# Altium PCB FK723MK1_ZGT6_DSUB.PcbDoc
Units mm, origin at the board's own origin, x right, y up, seen from the top; angles counter-clockwise.
Board outline 120 x 110 mm, 4 copper layers (Top Layer, GND, +3V3, Bottom Layer), stack 1.652 mm thick; 49 components, 138 nets, 316 pads, 50 vias.
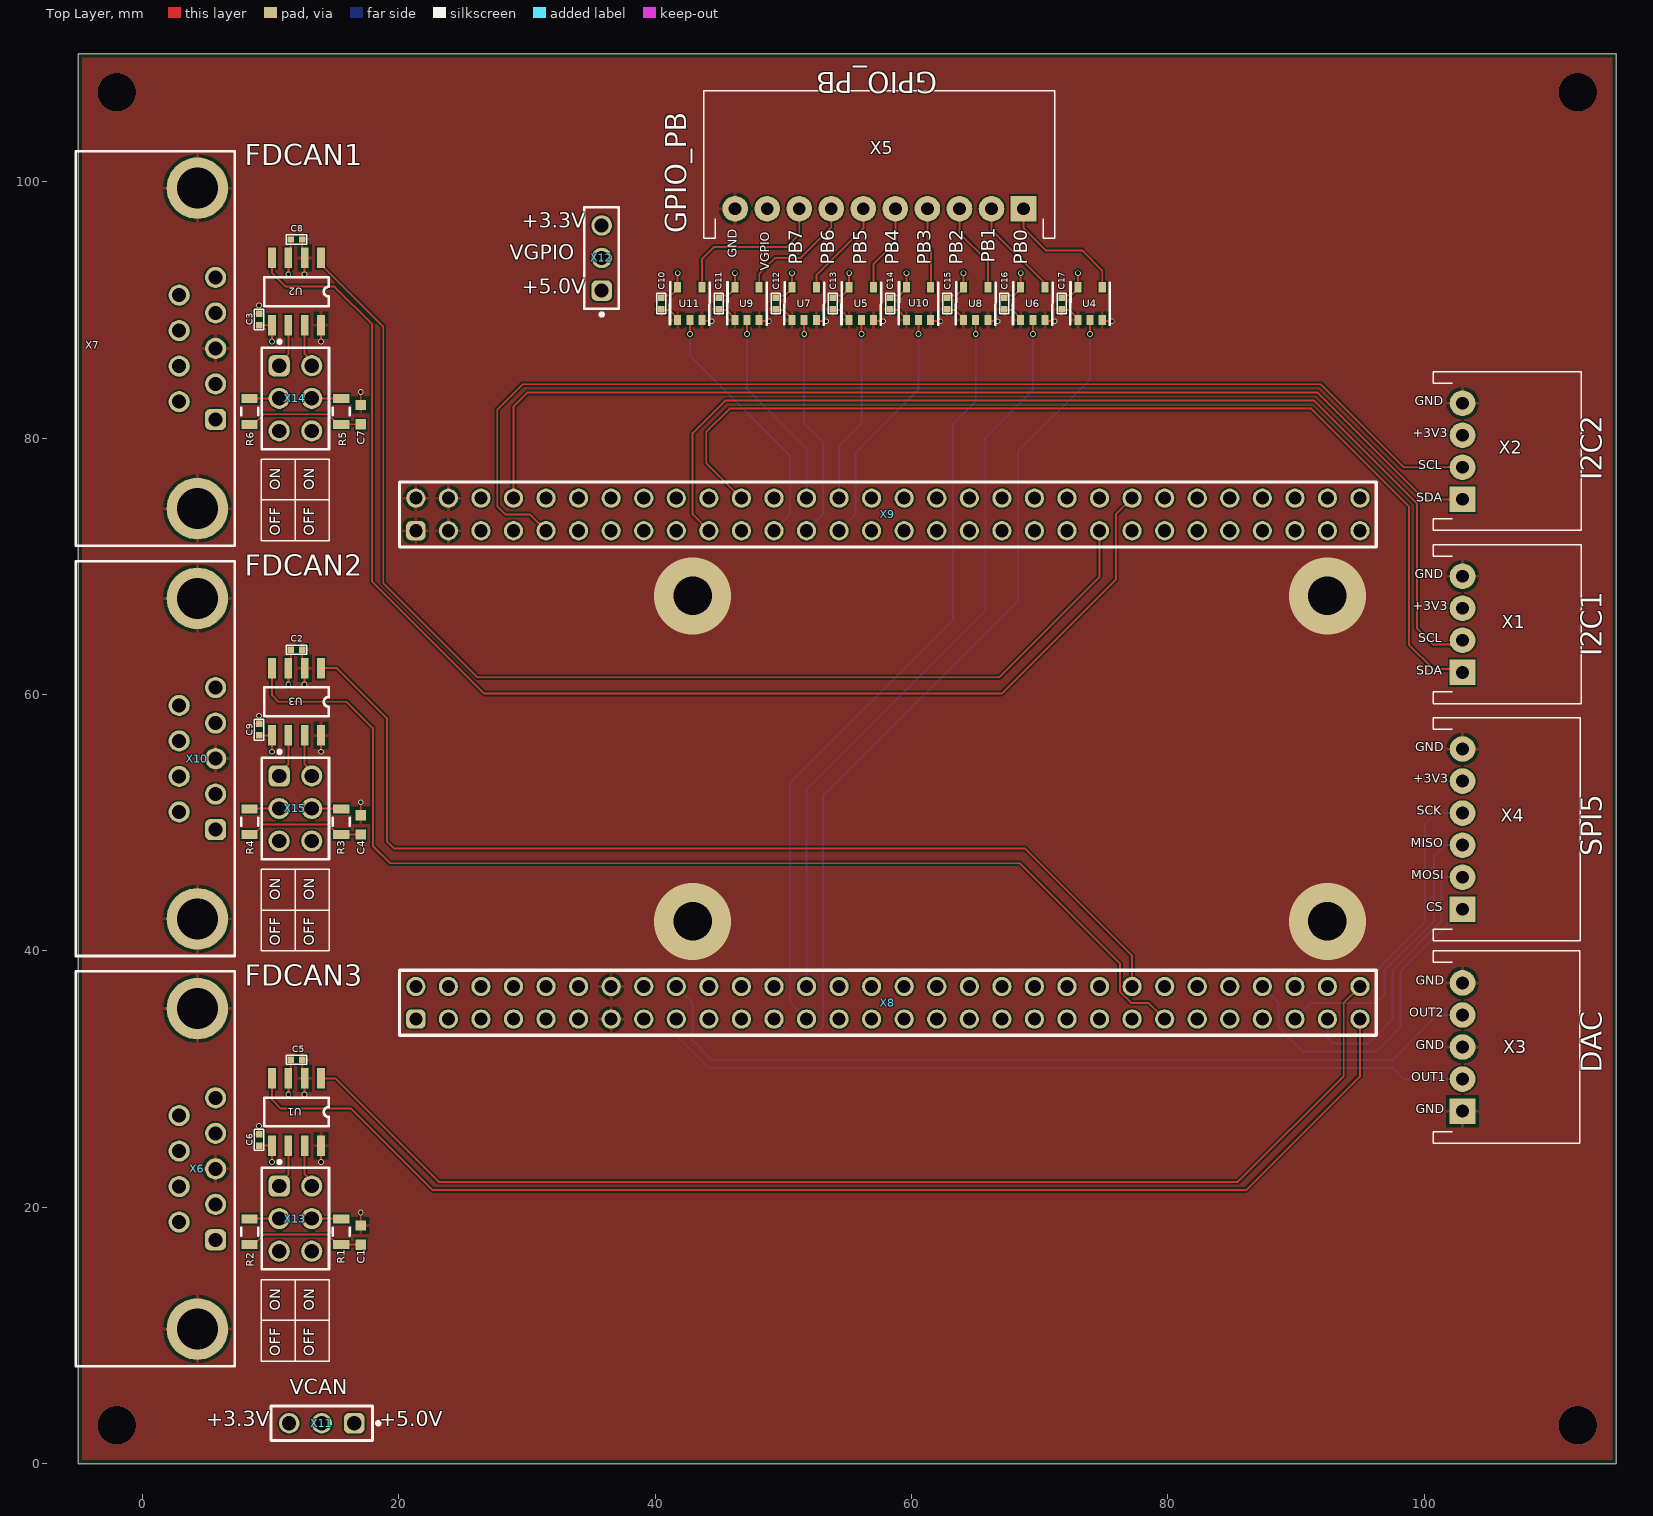
[diagram p0: Top Layer view]
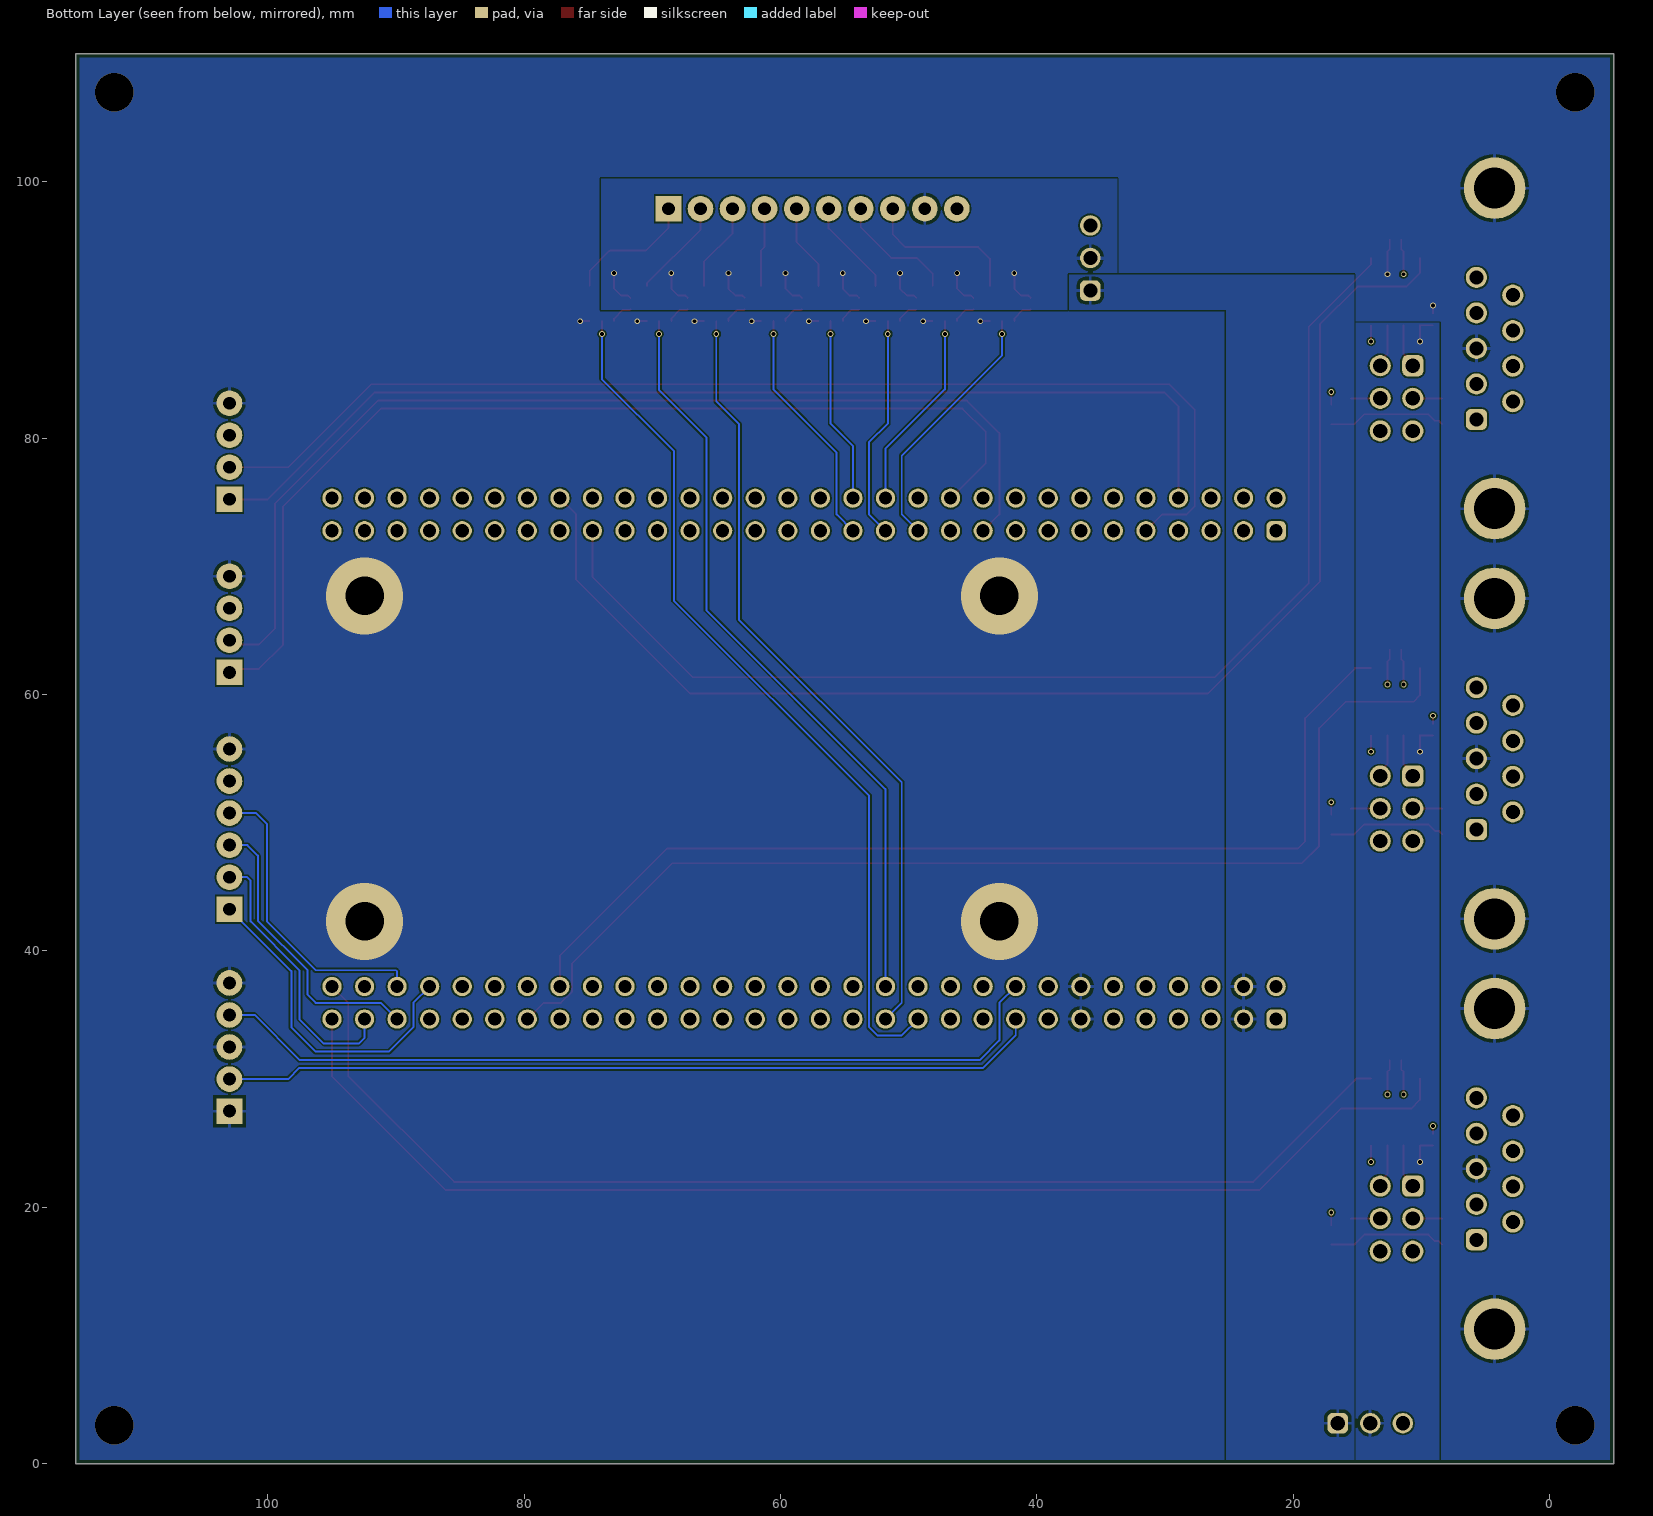
[diagram p1: Bottom Layer view, seen from below]
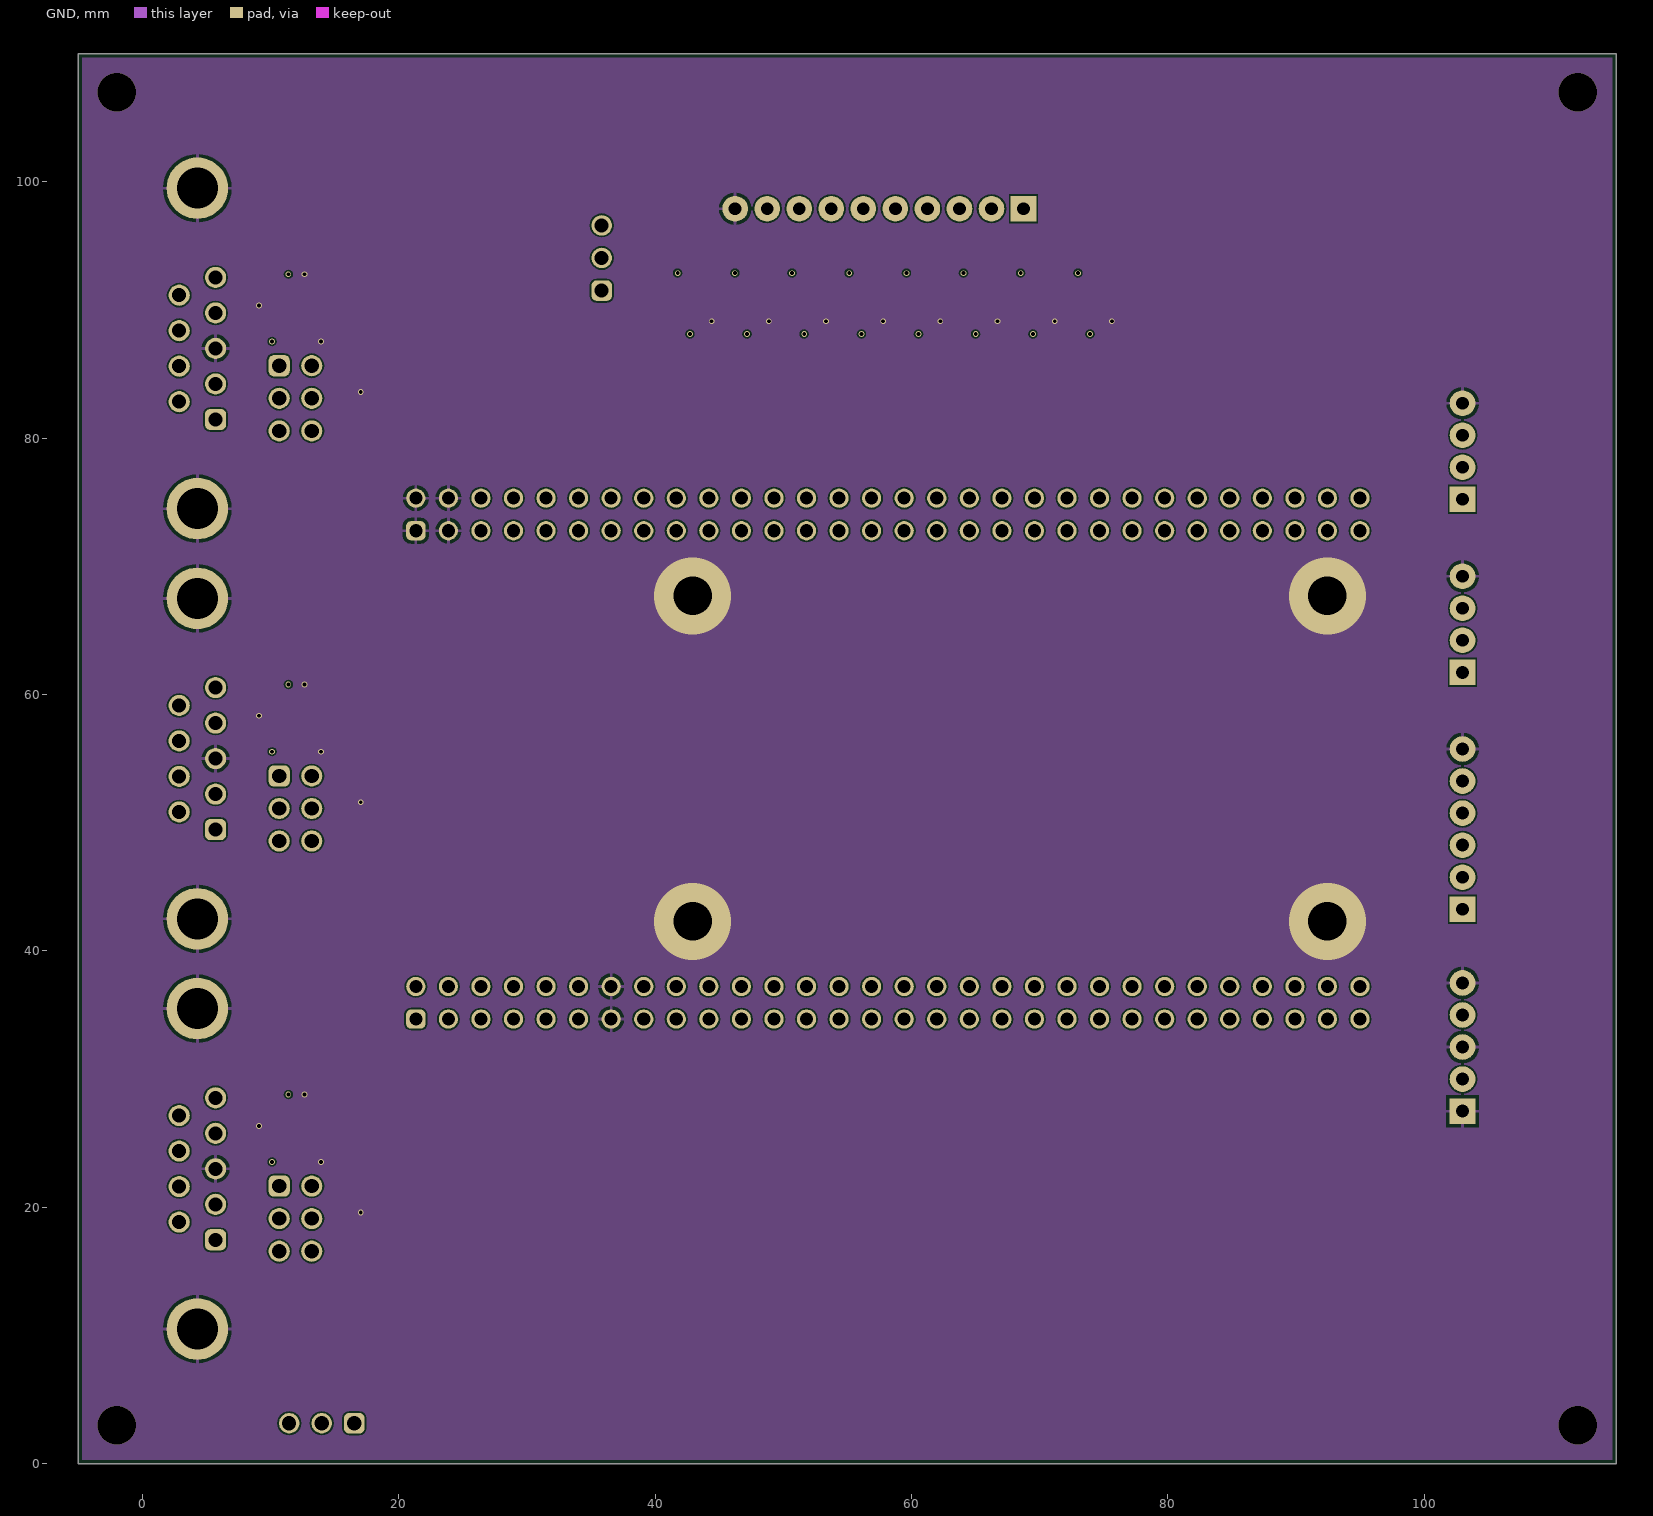
[diagram p2: GND]
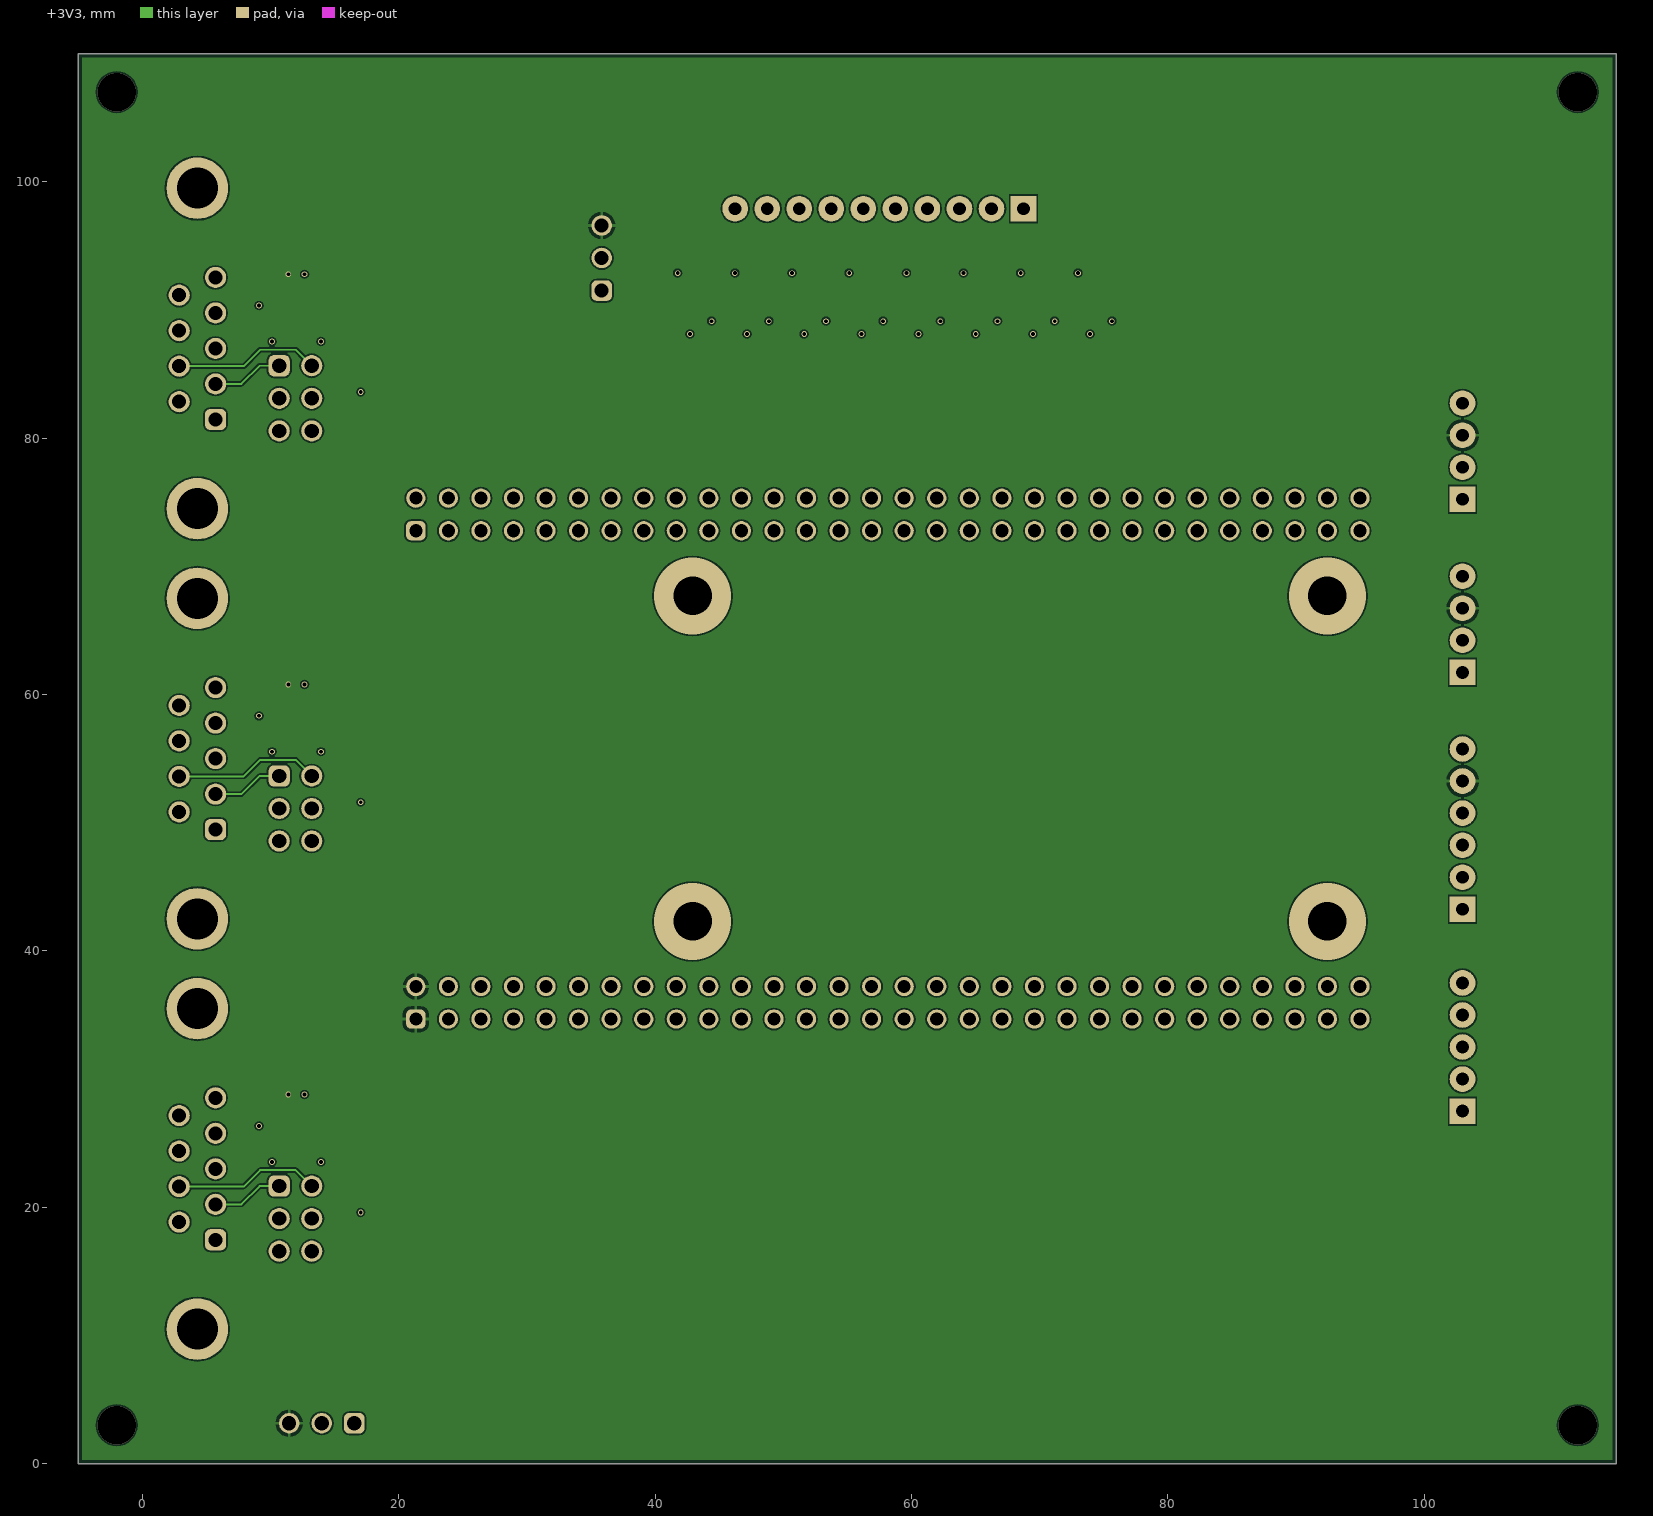
[diagram p3: +3V3]
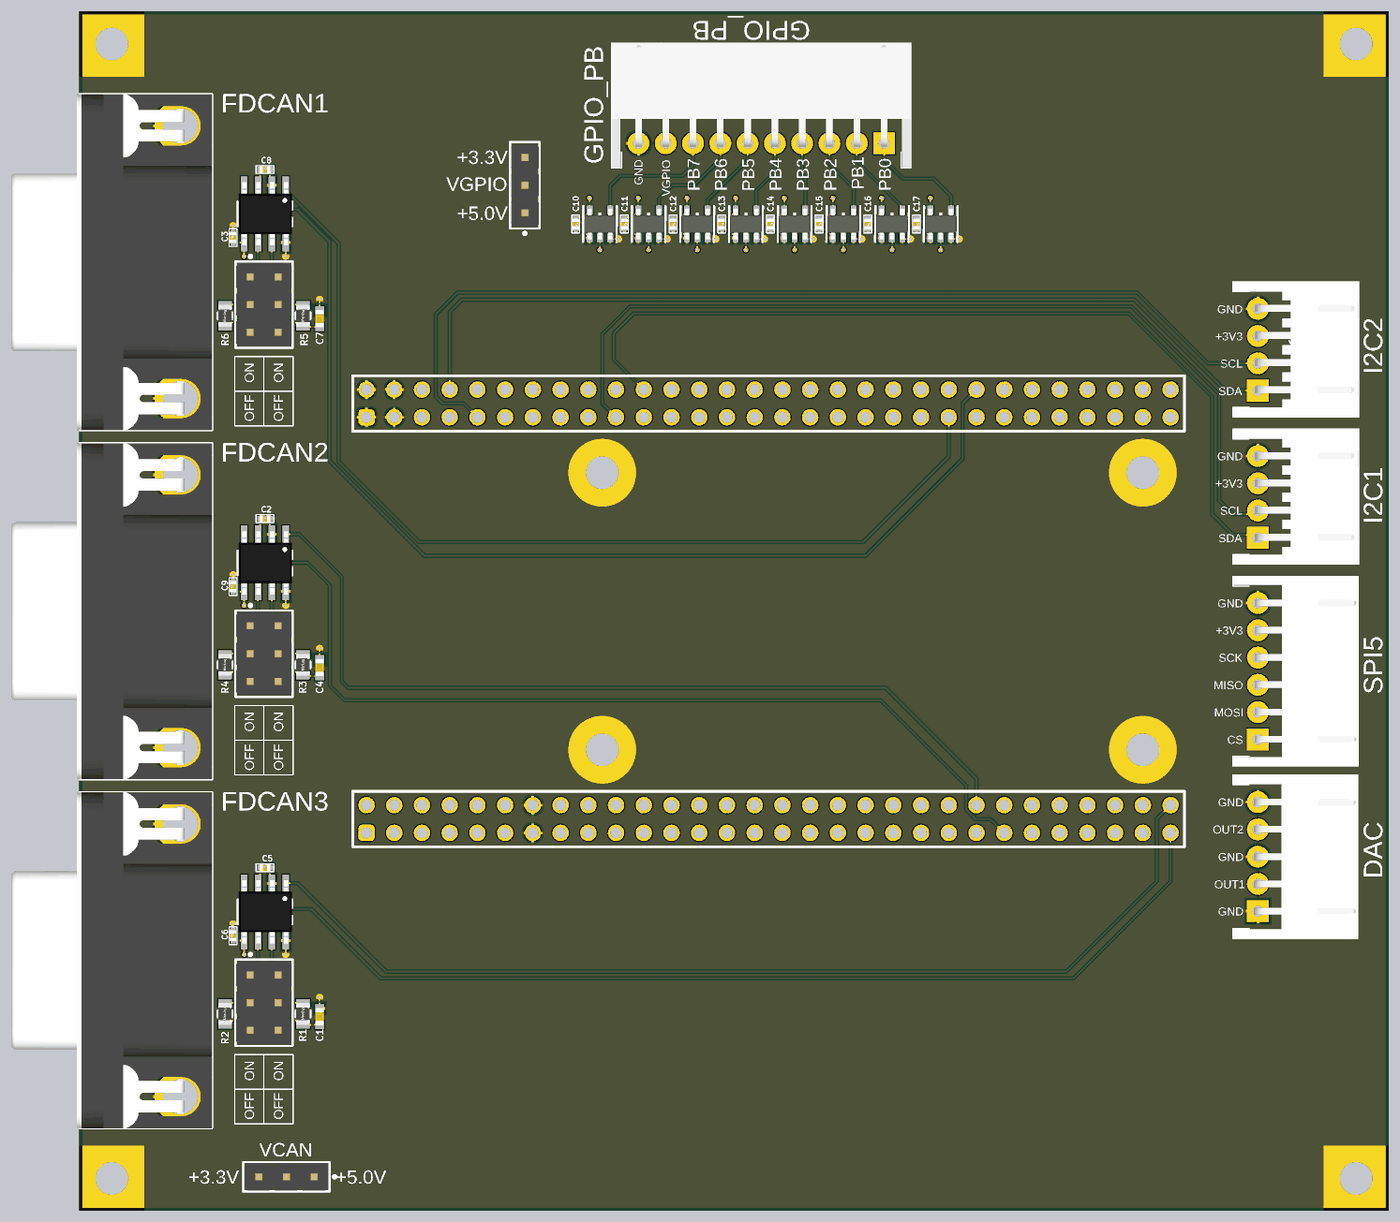
[diagram p4: 3D render of the assembled board from above, using the file's embedded part models]

## Layer stack, top to bottom
Top Solder: solder mask 0.0102, Solder Resist, Dk 3.5
Top Layer: signal copper 0.035
Prepreg 2x1080: core 0.156, FR-4, Dk 4.2
GND: signal copper 0.035
Core: prepreg 1.2, Dk 4.2
+3V3: signal copper 0.035
Prepreg 2x1080: core 0.156, Dk 4.2
Bottom Layer: signal copper 0.035
Bottom Solder: solder mask 0.0102, Solder Resist, Dk 3.5

## Board outline
-5,0 115,0 115,110 -5,110

## Design rules (kind name [scope] priority, off if disabled: settings)
BoardOutlineClearance [All] p1: gap=0.3 ignorepadtopadclearanceinfootprint=FALSE
Clearance [All] p1: gap=0.125 ignorepadtopadclearanceinfootprint=FALSE
FabricationTestPointUsage TestPointUsage [All] p1: valid=0 allowmultiple=FALSE
FabricationTestpoint Testpoint [All] p1: side=3 testpointundercomponent=TRUE minsize=1.016 maxsize=2.54 preferedsize=1.524 minholesize=0 maxholesize=1.016 preferedholesize=0.813 testpointgrid=0.025 allowsidetop=TRUE allowsidebottom=TRUE usegrid=TRUE gridtolerance=0
HoleSize [All] p1: absolutevalues=TRUE maxlimit=5.08 minlimit=0.025 maxpercent=80.000 minpercent=20.000
PolygonConnect PolygonConnect_Via [isVia] p1: connectstyle=Direct reliefconductorwidth=0.254 reliefentries=4 polygonreliefangle="90 Angle" airgapwidth=0.254
PolygonConnect PolygonConnect_Hole [HasFootprint('M2')] p2: connectstyle=Direct reliefconductorwidth=0.254 reliefentries=4 polygonreliefangle="90 Angle" airgapwidth=0.254
PolygonConnect [All] p3: connectstyle=Relief reliefconductorwidth=0.254 reliefentries=4 polygonreliefangle="90 Angle" airgapwidth=0.254
RoutingVias [All] p1: holewidth=0.4 width=0.8 viastyle="Through Hole" minholewidth=0.4 minwidth=0.8 maxholewidth=0.8 maxwidth=1.27
SilkToSolderMaskClearance SilkscreenOverComponentPads [IsPad] p1: minsilkscreentomaskgap=0.254 clearancetoexposedcopper=TRUE
SolderMaskExpansion [All] p1: expansion=0.102 istentingtop=FALSE
SupplyNets "Schematic Supply Nets_10" [InNet('VCAN')] p1: voltage=0.000
SupplyNets "Schematic Supply Nets_9" [InNet('VGPIO')] p2: voltage=0.000
SupplyNets "Schematic Supply Nets_8" [InNet('FDCAN3_RX')] p3: voltage=0.000
SupplyNets "Schematic Supply Nets_7" [InNet('FDCAN3_TX')] p4: voltage=0.000
SupplyNets "Schematic Supply Nets_6" [InNet('FDCAN1_RX')] p5: voltage=0.000
SupplyNets "Schematic Supply Nets_5" [InNet('FDCAN1_TX')] p6: voltage=0.000
SupplyNets "Schematic Supply Nets_4" [InNet('FDCAN2_TX')] p7: voltage=0.000
SupplyNets "Schematic Supply Nets_3" [InNet('FDCAN2_RX')] p8: voltage=0.000
SupplyNets "Schematic Supply Nets_2" [InNet('+5V0')] p9: voltage=0.000
SupplyNets "Schematic Supply Nets_1" [InNet('+3V3')] p10: voltage=0.000
SupplyNets "Schematic Supply Nets" [InNet('GND')] p11: voltage=0.000
UnpouredPolygon [All] p1: allowunpoured=TRUE
Width [All] p1: maxlimit=2 minlimit=0.125 preferedwidth=0.254 minimp=50.000000 maximp=50.000000 favimp=50.000000
25 further rules are at their usual default settings.

## Classes and differential pairs
component class FK723MK1_ZGT6_DSUB_Driver: C10 C11 C12 C13 C14 C15 C16 C17 C? U4 U5 U6 U7 U8 U9 U10 U11 X5 X11 X12
component class FK723MK1_ZGT6_DSUB: C1 C2 C3 C4 C5 C6 C7 C8 C9 D3 L1 R1 R2 R3 R4 R5 R6 R15 R16 R32 U1 U2 U3 X1 X2 X3 X4 X6 X7 X8 X9 X10 X13 X14 X15

## Components (designator, comment, footprint, x,y, rotation, side; value= is the part's Value field where it differs from the comment)
C1 "1nF" WCAP-CSGP_0603_L1.6W0.8H0.8_Reflow 17.043,17.831 r270 top
C2 "100nF" 0402 12.031,63.497 r0 top
C3 "100nF" 0402 9.11,89.258 r90 top
C4 "1nF" WCAP-CSGP_0603_L1.6W0.8H0.8_Reflow 17.043,49.831 r270 top
C5 "100nF" 0402 12.031,31.497 r0 top
C6 "100nF" 0402 9.11,25.258 r90 top
C7 "1nF" WCAP-CSGP_0603_L1.6W0.8H0.8_Reflow 17.043,81.831 r270 top
C8 "100nF" 0402 12.031,95.497 r0 top
C9 "100nF" 0402 9.11,57.258 r90 top
C10 "100nF" 0402 40.5,90.5 r270 top
C11 "100nF" 0402 44.96,90.5 r270 top
C12 "100nF" 0402 49.42,90.5 r270 top
C13 "100nF" 0402 53.88,90.5 r270 top
C14 "100nF" 0402 58.34,90.5 r270 top
C15 "100nF" 0402 62.8,90.5 r270 top
C16 "100nF" 0402 67.259,90.5 r270 top
C17 "100nF" 0402 71.719,90.5 r270 top
R1 "60R" WRIS-KSKE_0805 15.522,18.085 r90 top
R2 "60R" WRIS-KSKE_0805 8.382,18.085 r90 top
R3 "60R" WRIS-KSKE_0805 15.522,50.085 r90 top
R4 "60R" WRIS-KSKE_0805 8.382,50.085 r90 top
R5 "60R" WRIS-KSKE_0805 15.522,82.085 r90 top
R6 "60R" WRIS-KSKE_0805 8.382,82.085 r90 top
U1 "TJA1051T/3" SO-8 12.031,27.433 r180 top
U2 "TJA1051T/3" SO-8 12.031,91.433 r180 top
U3 "TJA1051T/3" SO-8 12.031,59.433 r180 top
U4 "74LVC1G125DBVRE4" DBV0005A_L 73.939,90.5 r90 top
U5 "74LVC1G125DBVRE4" DBV0005A_L 56.1,90.5 r90 top
U6 "74LVC1G125DBVRE4" DBV0005A_L 69.479,90.5 r90 top
U7 "74LVC1G125DBVRE4" DBV0005A_L 51.64,90.5 r90 top
U8 "74LVC1G125DBVRE4" DBV0005A_L 65.02,90.5 r90 top
U9 "74LVC1G125DBVRE4" DBV0005A_L 47.18,90.5 r90 top
U10 "74LVC1G125DBVRE4" DBV0005A_L 60.56,90.5 r90 top
U11 "74LVC1G125DBVRE4" DBV0005A_L 42.72,90.5 r90 top
X1 "JST_XH 4polig liegend" "JST_XH 4polig, liegend" 103,65.5 r90 top
X2 "JST_XH 4polig liegend" "JST_XH 4polig, liegend" 103,79 r90 top
X3 "JST_XH 5polig liegend" "JST_XH 5polig, liegend" 102.999,32.5 r90 top
X4 "JST_XH 6polig liegend" "JST_XH 6polig, liegend" 102.999,49.5 r90 top
X5 "JST_XH 10polig liegend" "JST_XH 10polig, liegend" 57.5,97.9 r180 top locked
X6 "618009211821" 618009211821 1,23 r270 top locked
X7 "618009211821" 618009211821 1,87 r270 top locked
X8 "Buchsenleiste 2x30" "Buchsenleiste 2x30polig" 21.34,34.68 r0 top locked
X9 "Buchsenleiste 2x30" "Buchsenleiste 2x30polig" 21.34,72.78 r0 top locked
X10 "618009211821" 618009211821 1,55 r270 top locked
X11 "61300311121" 61300311121 14,3.151 r180 top
X12 "61300311121" 61300311121 35.839,94.056 r90 top
X13 "61300621121" 61300621121 11.952,19.111 r270 top locked
X14 "61300621121" 61300621121 11.952,83.111 r270 top locked
X15 "61300621121" 61300621121 11.952,51.111 r270 top locked

## Footprints (in the part's own frame and the unit in brackets; to place one, negate y for a bottom-side part, rotate by r counter-clockwise, add the part's x,y. Pads: shape width x height; smd on the part's side, far side on the other; paste and mask are expansions set on the pad)
0402 [mm] "Chip Capacitor, 2-Leads, Body 3.50x2.50mm, IPC Medium Density"
  rect 0.5x0.5 smd mask+0.05: 1(-0.45,0) 2(0.45,0)
  silkscreen extent -0.81,-0.36 0.81,0.36, body extent -0.5,-0.3 0.5,0.3, height 0.2
61300311121 [mm] "Pin Header, pitch 2.54 mm, THT, Vertical, single row, 3p"
  rrect50% 1.6x1.6 hole 1.1: 1(-2.54,0)
  round 1.6 hole 1.1: 2(0,0) 3(2.54,0)
  silkscreen extent -4.53,-1.35 3.96,1.35, body extent -3.81,-1.27 3.81,1.27, height 8.57
61300621121 [mm] "Pin Header, pitch 2.54 mm, THT, Vertical, dual row, 6p"
  rrect50% 1.65x1.65 hole 1.1: 1(-2.54,-1.27)
  round 1.65 hole 1.1: 2(-2.54,1.27) 3(0,-1.27) 4(0,1.27) 5(2.54,-1.27) 6(2.54,1.27)
  silkscreen extent -4.54,-2.62 3.96,2.62, body extent -3.81,-2.54 3.81,2.54, height 8.59
618009211821 [mm] "09p 8.08mm bracket, board lock & UNC4-40 Rivet without hex screw"
  rrect50% 1.65x1.65 hole 1.09: 1(5.54,4.72)
  round 1.65 hole 1.09: 2(2.77,4.72) 3(0,4.72) 4(-2.77,4.72) 5(-5.54,4.72) 6(4.155,1.88) 7(1.385,1.88) 8(-1.385,1.88) 9(-4.155,1.88)
  round 4.8 hole 3.2: M1(-12.5,3.3) M2(12.5,3.3)
  silkscreen extent -15.4,-6.2 15.4,6.2, body extent -15.4,-12.2 15.4,6.2, height 12.55
"Buchsenleiste 2x30polig" [mm] "Buchsenleiste 2x30polig"
  rrect50% 1.5x1.5 hole 1.02: 1(0,0)
  round 1.5 hole 1.02: 2(0,2.54) 3(2.54,0) 4(2.54,2.54) 5(5.08,0) 6(5.08,2.54) 7(7.62,0) 8(7.62,2.54) 9(10.16,0) 10(10.16,2.54) 11(12.7,0) 12(12.7,2.54) 13(15.24,0) 14(15.24,2.54) 15(17.78,0) 16(17.78,2.54) 17(20.32,0) 18(20.32,2.54) 19(22.86,0) 20(22.86,2.54) 21(25.4,0) 22(25.4,2.54) 23(27.94,0) 24(27.94,2.54) 25(30.48,0) 26(30.48,2.54) 27(33.02,0) 28(33.02,2.54) 29(35.56,0) 30(35.56,2.54) 31(38.1,0) 32(38.1,2.54) 33(40.64,0) 34(40.64,2.54) 35(43.18,0) 36(43.18,2.54) 37(45.72,0) 38(45.72,2.54) 39(48.26,0) 40(48.26,2.54) 41(50.8,0) 42(50.8,2.54) 43(53.34,0) 44(53.34,2.54) 45(55.88,0) 46(55.88,2.54) 47(58.42,0) 48(58.42,2.54) 49(60.96,0) 50(60.96,2.54) 51(63.5,0) 52(63.5,2.54) 53(66.04,0) 54(66.04,2.54) 55(68.58,0) 56(68.58,2.54) 57(71.12,0) 58(71.12,2.54) 59(73.66,0) 60(73.66,2.54)
  silkscreen extent -1.27,-1.27 74.93,3.81
DBV0005A_L [mm]
  rect 0.8x0.55 smd paste+0 mask+0.051: 1(-1.275,0.95) 2(-1.275,0) 3(-1.275,-0.95) 4(1.275,-0.95) 5(1.275,0.95)
  silkscreen extent -1.65,-1.55 1.65,1.55, body extent -1.4,-1.45 1.4,1.45, height 1.2
"JST_XH 4polig, liegend" [mm] "JST_XH 4polig, liegend"
  rect 2x2 hole 1: 1(-3.77,0)
  round 2 hole 1: 2(-1.27,0) 3(1.23,0) 4(3.73,0)
  silkscreen extent -6.2,-9.25 6.2,2.29, body extent -6.2,-9.25 6.2,2.26, height 5.75
"JST_XH 5polig, liegend" [mm] "JST_XH 5polig, liegend"
  rect 2x2 hole 1: 1(-5,0)
  round 2 hole 1: 2(-2.5,0) 3(0,0) 4(2.5,0) 5(5,0)
  silkscreen extent -7.5,-9.14 7.5,2.29, body extent -7.45,-9.17 7.45,2.33, height 6.1
"JST_XH 6polig, liegend" [mm] "JST_XH 6polig, liegend"
  rect 2x2 hole 1: 1(-6.25,0)
  round 2 hole 1: 2(-3.75,0) 3(-1.25,0) 4(1.25,0) 5(3.75,0) 6(6.25,0)
  silkscreen extent -8.7,-9.2 8.7,2.29, body extent -8.68,-9.2 8.72,2.3, height 6.1
"JST_XH 10polig, liegend" [mm] "JST_XH 10polig, liegend"
  rect 2x2 hole 1: 1(-11.25,0)
  round 2 hole 1: 2(-8.75,0) 3(-6.25,0) 4(-3.75,0) 5(-1.25,0) 6(1.25,0) 7(3.75,0) 8(6.25,0) 9(8.75,0) 10(11.25,0)
  silkscreen extent -13.7,-9.2 13.7,2.29, body extent -13.7,-9.22 13.7,2.28, height 6.1
SO-8 [mm]
  rect 0.6x1.6 smd: 1(-1.905,-2.625) 2(-0.635,-2.625) 3(0.635,-2.625) 4(1.905,-2.625) 5(1.905,2.625) 6(0.635,2.625) 7(-0.635,2.625) 8(-1.905,2.625)
  silkscreen extent -2.5,-1.12 2.5,1.13, body extent -2.49,-2.89 2.41,2.89, height 1.45
WCAP-CSGP_0603_L1.6W0.8H0.8_Reflow [mm] "Ceramic Capacitors, body 1.6x0.8mm"
  rect 0.8x0.8 smd: 1(-0.75,0) 2(0.75,0)
  body extent -0.8,-0.4 0.8,0.4, height 0.8
WRIS-KSKE_0805 [mm] "Thick Film Resistors, SMT, body size 2x1.25mm"
  rect 0.7x1.25 smd: 1(-1,0) 2(1,0)
  silkscreen extent -0.3,-0.67 0.3,0.67, body extent -1,-0.63 1,0.62, height 0.6

## Part data
C1 C4 C7: library part 885012006014, "WCAP-CSGP Multilayer Ceramic Chip Capacitor, General Purpose, size 0603, 1nF, 10V", Capacitance Tolerance=+/-5%, Case/Size Code=0603, Insulation Resistance=10GΩ, Manufacturer="Wurth Elektronik", Max Operating Temperature=125°C, Min Operating Temperature=-55°C, Rated Voltage (DC)=10V, Capacitance=1nF, Category="Multilayer Ceramic Chip Capacitors", Ceramic Type=NP0, ComponentLink1Description="Website Link", ComponentLink1URL=https://www.we-online.com/redexpert/article/885012006014?ad, ComponentLink2Description="Datasheet Link", ComponentLink2URL=https://www.we-online.com/redexpert/spec/885012006014?ad, Height=0.8mm, Length=1.6mm, Manufacturer Part Number=885012006014, Match Code=WCAP-CSGP, Mount="Surface Mount", Packaging="Tape and Reel", Q Factor=1000, Technical Reference=NP00603102J010DFCT10000, Width=0.8mm
C2 C3 C5 C6 C8 C9 C10 C11 C12 C13 C14 C15 C16 C17: "100nF 16V 10% 0402", Trumpf Nr.=1606554
R1 R2 R3 R4 R5 R6: library part 560050320001, "WRIS-KSKE Thick Film Resistor, SMT, size 0805, 0.1Ω, 0.33W, +/-1%", Case/Size Code=0805, Manufacturer="Wurth Elektronik", Max Operating Temperature=155°C, Min Operating Temperature=-55°C, Rated Current=1.81A, Rated Power=0.33W, Resistance=0.1Ω, Resistance Tolerance=+/-1%, Temperature Coefficient of Resistance Max=250ppm/°C, Category="Thick Film Resistors", ComponentLink1Description="Website Link", ComponentLink1URL=https://www.we-online.com/redexpert/article/560050320001?ad, ComponentLink2Description="Datasheet Link", ComponentLink2URL=https://www.we-online.com/redexpert/spec/560050320001?ad, Height=0.6mm, Length=2mm, Manufacturer Part Number=560050320001, Match Code=WRIS-KSKE, Mount="Surface Mount", Packaging="Tape and Reel", Width=1.25mm
U4 U5 U6 U7 U8 U9 U10 U11: "Single 1.65-V to 5.5-V buffer with 3-state outputs 5-SOT-23 -40 to 125", Manufacturer_Name="Texas Instruments", Copyright="Copyright (C) 2025 Ultra Librarian. All rights reserved.", Manufacturer_Part_Number=74LVC1G125DBVRE4, RefDes=RefDes, TYPE=TYPE
X1 X2: library part "JST_XH 4polig"
X3: library part "JST_XH 5polig"
X4: library part "JST_XH 6polig"
X5: library part "JST_XH 10polig"
X6 X7 X10: "WR-DSUB 8.08mm Female PCB Connector without Hex Screw, THT, Angled, 9p", Contact Resistance=30mΩ, Manufacturer="Wurth Elektronik", Max Operating Temperature=105°C, Min Operating Temperature=-55°C, Rated Current=3A, Withstanding Voltage="1000V (AC)", Working Voltage="125V (AC)", Category="Input/Output Connector", ComponentLink1Description="Website Link", ComponentLink1URL=https://www.we-online.com/redexpert/article/618009211821?ad, ComponentLink2Description="Datasheet Link", ComponentLink2URL=https://www.we-online.com/redexpert/spec/618009211821?ad, Gender=Female, Manufacturer Part Number=618009211821, Match Code=WR-DSUB, Mount="Through Hole", Number of Pins=9, Orientation=Angled, Packaging=Tray
X11 X12: "WR-PHD Pin Header, THT, Vertical, pitch 2.54mm, 1 Row, 3P", Contact Resistance=20mOhm, Manufacturer="Wurth Elektronik", Operating Temperature Max=105°C, Operating Temperature Min=-40°C, Rated Current=3A, Withstanding Voltage=500V, Working Voltage=250V, Category="Board-to-Board Connectors", ComponentLink1Description="Website Link", ComponentLink1URL=https://www.we-online.com/redexpert/article/61300311121?ad, ComponentLink2Description="Datasheet Link", ComponentLink2URL=https://www.we-online.com/redexpert/spec/61300311121?ad, Gender="Pin Header", Manufacturer Part Number=61300311121, Match Code=WR-PHD, Mount="Through Hole", Number of Pins=3, Number of Rows=1, Orientation=Vertical, Packaging=Bag, Pitch=2.54mm
X13 X14 X15: "WR-PHD Pin Header, THT, Vertical, pitch 2.54mm, 2 Row, 6P", Contact Resistance=20mOhm, Manufacturer="Wurth Elektronik", Operating Temperature Max=105°C, Operating Temperature Min=-40°C, Rated Current=3A, Withstanding Voltage=500V, Working Voltage=250V, Category="Board-to-Board Connectors", ComponentLink1Description="Website Link", ComponentLink1URL=https://www.we-online.com/redexpert/article/61300621121?ad, ComponentLink2Description="Datasheet Link", ComponentLink2URL=https://www.we-online.com/redexpert/spec/61300621121?ad, Gender="Pin Header", Manufacturer Part Number=61300621121, Match Code=WR-PHD, Mount="Through Hole", Number of Pins=6, Number of Rows=2, Orientation=Vertical, Packaging=Bag, Pitch=2.54mm

## Via types
v1: diameter 0.45, hole 0.3, Top Layer to Bottom Layer, 42 vias
v2: diameter 3, hole 3, Top Layer to Bottom Layer, 4 vias
v3: diameter 6, hole 3, Top Layer to Bottom Layer, 4 vias

## Nets (pads, with @x,y where several pads share a name; then routed paths per layer and width w, separated by ;. In a path a pad name is that pad's centre, name@x,y a point inside that pad or via, vN(x,y) a via of type N, cw(c..) or ccw(c..) an arc to the next point about the centre after c; other vN are vias at no path point)
+3V3: C2.1 C5.1 C8.1 U1.3 U2.3 U3.3 X1.3 X2.3 X4.5 X8.1 X8.2 X11.3 X12.3 | length 8.4
  Top Layer w0.15: v1(11.396,28.788) U1.3 11.396,30.558 11.581,30.743 C5.1 ; v1(11.396,60.788) U3.3 11.396,62.558 11.581,62.743 C2.1 ; v1(11.396,92.788) U2.3 11.396,94.558 11.581,94.743 C8.1
+5V0: X8.3 X8.4 X11.1 X12.1
_GPIO_PB0: U4.2 X8.23 | length 68.3
  Top Layer w0.15: v1(73.939,88.125) U4.2@73.939,89.125
  Bottom Layer w0.15: X8.23 50.55,33.41 52.455,33.41 53.09,34.045 53.09,52.088 68.33,67.328 68.33,79.002 73.939,84.612 v1(73.939,88.125)
_GPIO_PB1: U6.2 X8.26 | length 59.2
  Top Layer w0.15: v1(69.479,88.125) U6.2@69.479,89.125
  Bottom Layer w0.15: X8.26 51.82,52.614 65.79,66.584 65.79,80.054 69.479,83.744 v1(69.479,88.125)
_GPIO_PB2: U8.2 X8.25 | length 61
  Top Layer w0.15: v1(65.02,88.125) U8.2@65.02,89.125
  Bottom Layer w0.15: X8.25 50.55,35.95 50.55,53.14 63.25,65.84 63.25,81.107 65.02,82.876 v1(65.02,88.125)
_GPIO_PB3: U10.2 X9.27 | length 18.9
  Top Layer w0.15: v1(60.56,88.125) U10.2@60.56,89.125
  Bottom Layer w0.15: X9.27 55.63,74.05 55.63,78.875 60.56,83.804 v1(60.56,88.125)
_GPIO_PB4: U5.2 X9.28 | length 14.5
  Top Layer w0.15: v1(56.1,88.125) U5.2@56.1,89.125
  Bottom Layer w0.15: X9.28 54.36,79.401 56.1,81.141 v1(56.1,88.125)
_GPIO_PB5: U7.2 X9.25 | length 17.5
  Top Layer w0.15: v1(51.64,88.125) U7.2@51.64,89.125
  Bottom Layer w0.15: v1(51.64,88.125) 51.64,81.144 53.111,79.672 53.111,74.071 X9.25
_GPIO_PB6: U9.2 X9.26 | length 15.7
  Top Layer w0.15: v1(47.18,88.125) U9.2@47.18,89.125
  Bottom Layer w0.15: v1(47.18,88.125) 47.18,83.807 51.82,79.167 X9.26
_GPIO_PB7: U11.2 X9.23 | length 20.1
  Top Layer w0.15: v1(42.72,88.125) U11.2@42.72,89.125
  Bottom Layer w0.15: v1(42.72,88.125) 42.72,86.471 50.55,78.641 50.55,74.05 X9.23
CANH_1: U2.7 X7.7 X14.2 | length 14.8
  Top Layer w0.15: U2.7 12.666,86.58 13.222,86.024 X14.2
  +3V3 w0.15: X7.7 7.915,85.615 9.2,86.9 11.973,86.9 X14.2
CANH_2: U3.7 X10.7 X15.2 | length 14.8
  Top Layer w0.15: U3.7 12.666,54.58 13.222,54.024 X15.2
  +3V3 w0.15: X10.7 7.915,53.615 9.2,54.9 11.973,54.9 X15.2
CANH_3: U1.7 X6.7 X13.2 | length 14.8
  Top Layer w0.15: U1.7 12.666,22.58 13.222,22.024 X13.2
  +3V3 w0.15: X6.7 7.915,21.615 9.2,22.9 11.973,22.9 X13.2
CANL_1: U2.6 X7.2 X14.1 | length 9
  Top Layer w0.15: X14.1 10.682,85.834 11.396,86.548 U2.6
  +3V3 w0.15: X7.2 7.73,84.23 9.151,85.651 X14.1
CANL_2: U3.6 X10.2 X15.1 | length 9
  Top Layer w0.15: X15.1 10.682,53.834 11.396,54.548 U3.6
  +3V3 w0.15: X10.2 7.73,52.23 9.151,53.651 X15.1
CANL_3: U1.6 X6.2 X13.1 | length 9
  Top Layer w0.15: X13.1 10.682,21.834 11.396,22.548 U1.6
  +3V3 w0.15: X6.2 7.73,20.23 9.151,21.651 X13.1
DAC1_OUT1: X3.2 X8.17 | length 64
  Bottom Layer w0.15: X8.17 41.66,33.41 44.2,30.87 97.54,30.87 98.41,30 X3.2
DAC1_OUT2: X3.4 X8.18 | length 66.9
  Bottom Layer w0.15: X8.18 42.93,35.95 42.93,33.017 44.442,31.505 97.54,31.505 101.035,35 X3.4
FDCAN1_RX: U2.4 X9.46 | length 102.9
  Top Layer w0.15: U2.4 10.126,92.884 11.18,91.83 14.99,91.83 17.932,88.888 17.932,68.809 26.661,60.08 67.06,60.08 75.95,68.97 75.95,74.05 X9.46
FDCAN1_TX: U2.1 X9.43 | length 93.1
  Top Layer w0.15: U2.1 13.936,93.558 18.8,88.694 18.8,68.7 26.15,61.35 66.85,61.35 74.68,69.18 X9.43
FDCAN2_RX: U3.4 X8.47 | length 88.9
  Top Layer w0.15: U3.4 10.126,59.927 10.617,59.436 15.926,59.436 17.983,57.379 17.983,48.184 19.329,46.838 68.453,46.838 76.27,39.021 76.27,36.826 77.147,35.95 78.49,35.95 X8.47
FDCAN2_TX: U3.1 X8.46 | length 80.6
  Top Layer w0.15: U3.1 15.183,62.058 19.075,58.166 19.075,48.565 19.66,47.98 21.109,47.98 68.872,47.98 77.22,39.632 X8.46
FDCAN3_RX: U1.4 X8.59 | length 97.6
  Top Layer w0.15: U1.4 10.126,28.374 10.8,27.7 16.3,27.7 22.655,21.345 24.82,21.345 86.11,21.345 95,30.235 X8.59
FDCAN3_TX: U1.1 X8.60 | length 94.1
  Top Layer w0.15: U1.1 15.042,30.058 23.12,21.98 24.1,21.98 85.475,21.98 93.73,30.235 93.73,35.95 X8.60
GND: C1.1 C2.2 C3.2 C4.1 C5.2 C6.2 C7.1 C8.2 C9.2 C10.2 C11.2 C12.2 C13.2 C14.2 C15.2 C16.2 C17.2 U1.2 U1.8 U2.2 U2.8 U3.2 U3.8 U4.1 U4.3 U5.1 U5.3 U6.1 U6.3 U7.1 U7.3 U8.1 U8.3 U9.1 U9.3 U10.1 U10.3 U11.1 U11.3 X1.4 X2.4 X3.1 X3.3 X3.5 X4.6 X5.10 X6.3 X6.M1 X6.M2 X7.3 X7.M1 X7.M2 X8.13 X8.14 X9.1 X9.2 X9.3 X9.4 X10.3 X10.M1 X10.M2 | length 37.3
  Top Layer w0.15: C6.2 v1(9.11,26.343) ; C9.2 v1(9.11,58.343) ; C3.2 v1(9.11,90.343) ; C5.2 12.481,30.743 12.666,30.558 U1.2 v1(12.666,28.788) ; C2.2 12.481,62.743 12.666,62.558 U3.2 v1(12.666,60.788) ; C8.2 12.481,94.743 12.666,94.558 U2.2 v1(12.666,92.788) ; v1(13.936,23.538) U1.8 ; v1(13.936,55.538) U3.8 ; v1(13.936,87.538) U2.8 ; C1.1 v1(17.043,19.597) ; C4.1 v1(17.043,51.597) ; C7.1 v1(17.043,83.597) ; C10.2 40.55,90 41.095,90 41.77,89.325 U11.1@41.77,89.125 ; U11.3@43.67,89.125 v1(44.42,89.125) ; C11.2 45.01,90 45.555,90 46.23,89.325 U9.1@46.23,89.125 ; U9.3@48.13,89.125 v1(48.88,89.125) ; C12.2 49.47,90 50.015,90 50.69,89.325 U7.1@50.69,89.125 ; U7.3@52.59,89.125 v1(53.34,89.125) ; C13.2 53.93,90 54.475,90 55.15,89.325 U5.1@55.15,89.125 ; U5.3@57.05,89.125 v1(57.8,89.125) ; C14.2 58.39,90 58.935,90 59.61,89.325 U10.1@59.61,89.125 ; U10.3@61.51,89.125 v1(62.26,89.125) ; C15.2 62.85,90 63.395,90 64.07,89.325 U8.1@64.07,89.125 ; U8.3@65.97,89.125 v1(66.72,89.125) ; C16.2 67.309,90 67.854,90 68.529,89.325 U6.1@68.529,89.125 ; U6.3@70.429,89.125 v1(71.179,89.125) ; C17.2 71.769,90 72.314,90 72.989,89.325 U4.1@72.989,89.125 ; U4.3@74.889,89.125 v1(75.639,89.125)
  other v2: -2,3 112,3 -2,107 112,107
  other v3: 42.93,42.3 92.46,42.3 42.93,67.7 92.46,67.7
GPIO_PB0: U4.4 X5.1 | length 10.2
  Top Layer w0.15: X5.1 68.75,96.39 70.485,94.655 73.304,94.655 73.355,94.605 74.889,93.07 U4.4@74.889,91.875
GPIO_PB1: U6.4 X5.2 | length 7.8
  Top Layer w0.15: X5.2 66.25,96.254 70.429,92.075 U6.4@70.429,91.875
GPIO_PB2: U8.4 X5.3 | length 6.9
  Top Layer w0.15: X5.3 63.75,96.005 65.97,93.786 U8.4@65.97,91.875
GPIO_PB3: U10.4 X5.4 | length 6.2
  Top Layer w0.15: X5.4 61.25,94.924 61.544,94.63 61.544,91.91 U10.4@61.51,91.875
GPIO_PB4: U5.4 X5.5 | length 6.7
  Top Layer w0.15: U5.4@57.05,91.875 57.05,93.59 58.75,95.29 X5.5
GPIO_PB5: U7.4 X5.6 | length 7.5
  Top Layer w0.15: U7.4@52.59,91.875 52.59,92.711 56.25,96.371 X5.6
GPIO_PB6: U9.4 X5.7 | length 9.5
  Top Layer w0.15: U9.4@48.13,91.875 48.13,92.823 49.378,94.071 51.384,94.071 53.75,96.437 X5.7
GPIO_PB7: U11.4 X5.8 | length 12.5
  Top Layer w0.15: U11.4@43.67,91.875 43.67,94.002 44.577,94.909 50.267,94.909 51.25,95.892 X5.8
I2C1_SCL: X1.2 X9.19 | length 83
  Top Layer w0.15: X9.19 42.93,74.05 42.93,80.4 45.465,82.935 91.417,82.935 99.445,74.907 99.445,65.16 100.715,63.89 101.978,63.89 101.984,63.896 102.666,63.896 X1.2
I2C1_SDA: X1.1 X9.22 | length 80.8
  Top Layer w0.15: X9.22 44,78.06 44,80.485 45.82,82.305 91.19,82.305 98.81,74.685 98.81,63.89 100.7,62 X1.1@103,62
I2C2_SCL: X2.2 X9.9 | length 91
  Top Layer w0.15: X9.9 30.23,74.05 28.325,74.05 27.69,74.685 27.69,82.225 29.67,84.205 91.943,84.205 98.418,77.73 X2.2
I2C2_SDA: X2.1 X9.8 | length 85.1
  Top Layer w0.15: X9.8 28.96,82.46 30.07,83.57 91.68,83.57 100.02,75.23 X2.1
NetC1_2: C1.2 R1.1 R2.1 | length 9.3
  Top Layer w0.15: R2.1 8.657,17.36 8.952,17.36 9.457,17.865 14.467,17.865 15.247,17.085 R1.1 17.039,17.085 C1.2
NetC4_2: C4.2 R3.1 R4.1 | length 9.3
  Top Layer w0.15: R4.1 8.657,49.36 8.952,49.36 9.457,49.865 14.467,49.865 15.247,49.085 R3.1 17.039,49.085 C4.2
NetC7_2: C7.2 R5.1 R6.1 | length 9.3
  Top Layer w0.15: R6.1 8.657,81.36 8.952,81.36 9.457,81.865 14.467,81.865 15.247,81.085 R5.1 17.039,81.085 C7.2
NetR1_2: R1.2 X13.4 | length 2.3
  Top Layer w0.15: X13.4 15.496,19.111 R1.2
NetR2_2: R2.2 X13.3 | length 2.3
  Top Layer w0.15: R2.2 8.408,19.111 X13.3
NetR3_2: R3.2 X15.4 | length 2.3
  Top Layer w0.15: X15.4 15.496,51.111 R3.2
NetR4_2: R4.2 X15.3 | length 2.3
  Top Layer w0.15: R4.2 8.408,51.111 X15.3
NetR5_2: R5.2 X14.4 | length 2.3
  Top Layer w0.15: X14.4 15.496,83.111 R5.2
NetR6_2: R6.2 X14.3 | length 2.3
  Top Layer w0.15: R6.2 8.408,83.111 X14.3
PA0: X8.10
PA1: X8.9
PA2: X8.11
PA3: X8.20
PA6: X8.19
PA7: X8.22
PA8: X9.47
PA9: X9.6
PA10: X9.5
PA11: X8.5
PA12: X8.6
PA15: X9.44
PB10: X8.44
PB11: X8.42
PB14: X8.45
PB15: X8.48
PC0: X8.8
PC1: X8.7
PC2_C: X8.15
PC3_C: X8.16
PC4: X8.21
PC5: X8.24
PC6: X9.51
PC7: X9.52
PC8: X9.49
PC9: X9.50
PC10: X9.41
PC11: X9.48
PC12: X9.45
PC13: X9.7
PD2: X9.42
PD3: X9.39
PD4: X9.40
PD5: X9.37
PD6: X9.38
PD7: X9.35
PD8: X8.49
PD9: X8.50
PD10: X8.51
PD11: X8.52
PD14: X9.59
PD15: X9.60
PE0: X9.21
PE1: X9.24
PE2: X9.20
PE3: X9.17
PE4: X9.18
PE5: X9.15
PE6: X9.16
PE7: X8.33
PE8: X8.35
PE9: X8.36
PE10: X8.37
PE11: X8.38
PE12: X8.39
PE13: X8.40
PE14: X8.41
PE15: X8.43
PF2: X9.10
PF3: X9.12
PF4: X9.11
PF5: X9.14
PF10: X8.53
PF11: X8.28
PF12: X8.27
PF13: X8.30
PF14: X8.29
PF15: X8.32
PG0: X8.31
PG1: X8.34
PG2: X9.57
PG3: X9.58
PG4: X9.55
PG5: X9.56
PG6: X8.58
PG7: X9.53
PG8: X9.54
PG9: X9.36
PG10: X9.33
PG11: X9.34
PG12: X9.31
PG13: X9.32
PG14: X9.29
PG15: X9.30
SPI5_MISO: X4.3 X8.55 | length 22.8
  Bottom Layer w0.15: X8.55 91.19,35.95 96.27,35.95 96.905,36.585 96.905,38.477 100.777,42.349 100.777,47.429 101.598,48.25 X4.3
SPI5_MOSI: X4.2 X8.57 | length 21.6
  Bottom Layer w0.15: X8.57 92.46,33.234 92.919,32.775 95.635,32.775 97.54,34.68 97.54,38.49 101.35,42.3 101.35,45.475 101.625,45.75 X4.2
SPI5_SCK: X4.4 X8.56 | length 23.8
  Bottom Layer w0.15: X8.56 89.92,38.402 90.008,38.49 96.27,38.49 100.08,42.3 100.08,49.92 100.91,50.75 X4.4
VBAT: X9.13
VCAN: C3.1 C6.1 C9.1 U1.5 U2.5 U3.5 X11.2 | length 6.9
  Top Layer w0.15: C6.1 U1.5 v1(10.126,23.538) ; C9.1 U3.5 v1(10.126,55.538) ; C3.1 U2.5 v1(10.126,87.538)
VGPIO: C10.1 C11.1 C12.1 C13.1 C14.1 C15.1 C16.1 C17.1 U4.5 U5.5 U6.5 U7.5 U8.5 U9.5 U10.5 U11.5 X5.9 X12.2 | length 22.2
  Top Layer w0.15: C10.1 40.675,91.125 41.22,91.125 41.77,91.675 41.77,91.875 v1(41.77,92.875) ; C11.1 45.135,91.125 45.68,91.125 46.23,91.675 46.23,91.875 v1(46.23,92.875) ; C12.1 49.595,91.125 50.14,91.125 50.69,91.675 50.69,91.875 v1(50.69,92.875) ; C13.1 54.055,91.125 54.6,91.125 55.15,91.675 55.15,91.875 v1(55.15,92.875) ; C14.1 58.515,91.125 59.06,91.125 59.61,91.675 59.61,91.875 v1(59.61,92.875) ; C15.1 62.975,91.125 63.52,91.125 64.07,91.675 64.07,91.875 v1(64.07,92.875) ; C16.1 67.434,91.125 67.979,91.125 68.529,91.675 68.529,91.875 v1(68.529,92.875) ; C17.1 71.894,91.125 72.439,91.125 72.989,91.675 72.989,91.875 v1(72.989,92.875)
VREF: X8.12
~CS: X4.1 X8.54 | length 26
  Bottom Layer w0.15: X8.54 88.65,35.95 88.65,34.045 90.555,32.14 96.27,32.14 98.175,34.045 98.175,38.426 X4.1
pads on no net: X6.1 X6.4 X6.5 X6.6 X6.8 X6.9 X7.1 X7.4 X7.5 X7.6 X7.8 X7.9 X10.1 X10.4 X10.5 X10.6 X10.8 X10.9 X13.5 X13.6 X14.5 X14.6 X15.5 X15.6

## Polygon pours and split planes (outlines as drawn)
GND on Bottom Layer "BOT" (solid, pour order 20): -5,0 115,0 115,110 -5,110
VGPIO on Bottom Layer "Bottom Layer-VGPIO" (solid, pour order 18): 33.75,90 33.75,100.25 74,100.25 74,90
+5V0 on Bottom Layer "Bottom Layer-+5V0" (solid, pour order 17): 15.25,0 15.25,92.761 37.5,92.761 37.5,90 25.25,90 25.25,0
VCAN on Bottom Layer "Bottom Layer-VCAN" (solid, pour order 19): 8.6,0 17.392,0 17.392,89 8.6,89
GND on GND "GND" (solid, pour order 13): -5,0 115,0 115,110 -5,110
+3V3 on +3V3 "+3v3" (solid, pour order 14): -5,0 115,0 115,110 -5,110
GND on Top Layer "TOP" (solid, pour order 12): -5,0 115,0 115,110 -5,110

## Silkscreen, mask and mechanical layers (free items; w line width, h text height)
Top Overlay:
  lines w0.1: 9.271,11.18 14.605,11.18 ; 9.271,43.18 14.605,43.18 ; 9.271,75.18 14.605,75.18 ; 11.938,8.005 11.938,14.355 ; 11.938,40.005 11.938,46.355 ; 11.938,72.005 11.938,78.355 ; 9.271,8.005 9.271,14.355 14.605,14.355 14.605,8.005 9.271,8.005 ; 9.271,40.005 14.605,40.005 14.605,46.355 9.271,46.355 9.271,40.005 ; 9.271,72.005 9.271,78.355 14.605,78.355 14.605,72.005 9.271,72.005
  text "GPIO_PB" at 62,109.103 h2.8 r180
  text "FDCAN1" at 8,100.729 h2.8
  text "+3.3V" at 29.621,96.009 h2
  text "GPIO_PB" at 43.003,96 h2.8 r90
  text "GND" at 46.622,94.071 h1.2 r90
  text "PB1" at 66.872,93.677 h1.8 r90
  text "VGPIO" at 28.653,93.544 h2
  text "PB2" at 64.371,93.537 h1.8 r90
  text "PB7" at 51.841,93.529 h1.8 r90
  text "PB6" at 54.344,93.529 h1.8 r90
  text "PB5" at 56.853,93.523 h1.8 r90
  text "PB4" at 59.359,93.532 h1.8 r90
  text "PB3" at 61.862,93.529 h1.8 r90
  text "PB0" at 69.374,93.532 h1.8 r90
  text "VGPIO" at 49.151,93.044 h1.2 r90
  text "+5.0V" at 29.621,90.877 h2
  text "GND" at 99.268,82.326 h1.2
  text "+3V3" at 99.111,79.837 h1.2
  text "SCL" at 99.538,77.336 h1.2
  text "I2C2" at 114.402,76.717 h2.8 r90
  text "ON" at 11.034,75.942 h1.4 r90
  text "ON" at 13.701,75.942 h1.4 r90
  text "SDA" at 99.379,74.815 h1.2
  text "OFF" at 11.034,72.386 h1.4 r90
  text "OFF" at 13.701,72.386 h1.4 r90
  text "GND" at 99.268,68.838 h1.2
  text "FDCAN2" at 8,68.729 h2.8
  text "+3V3" at 99.111,66.35 h1.2
  text "SCL" at 99.538,63.849 h1.2
  text "I2C1" at 114.402,63.001 h2.8 r90
  text "SDA" at 99.379,61.328 h1.2
  text "GND" at 99.292,55.358 h1.2
  text "+3V3" at 99.135,52.87 h1.2
  text "SCK" at 99.407,50.369 h1.2
  text "MISO" at 98.946,47.848 h1.2
  text "SPI5" at 114.402,47.38 h2.8 r90
  text "MOSI" at 98.995,45.348 h1.2
  text "ON" at 11.034,43.942 h1.4 r90
  text "ON" at 13.701,43.942 h1.4 r90
  text "CS" at 100.181,42.848 h1.2
  text "OFF" at 11.034,40.386 h1.4 r90
  text "OFF" at 13.701,40.386 h1.4 r90
  text "GND" at 99.341,37.108 h1.2
  text "FDCAN3" at 8,36.731 h2.8
  text "OUT2" at 98.856,34.619 h1.2
  text "GND" at 99.341,32.108 h1.2
  text "DAC" at 114.402,30.489 h2.8 r90
  text "OUT1" at 98.997,29.598 h1.2
  text "GND" at 99.341,27.108 h1.2
  text "ON" at 11.034,11.942 h1.4 r90
  text "ON" at 13.701,11.942 h1.4 r90
  text "OFF" at 11.034,8.386 h1.4 r90
  text "OFF" at 13.701,8.386 h1.4 r90
  text "VCAN" at 11.501,5.021 h2
  text "+3.3V" at 5,2.522 h2
  text "+5.0V" at 18.5,2.521 h2
  text "2031588" at 237.75,-32.285 h3.81
  text ".DokumentenNrBestueckungsplan" at 181.489,-46.255 h3.81
Bottom Paste:
  rectangle: 0,-51.5 6,-45.5
  rectangle: 109,-51.5 115,-45.5
Top Solder:
  rectangle: 109,104 115,110
  rectangle: 109,0 115,6
  rectangle: -5,0 1,6
  rectangle: -5,104 1,110
Bottom Solder:
  rectangle: -5,104 1,110
  rectangle: 109,104 115,110
  rectangle: 109,0 115,6
  rectangle: -5,0 1,6
Mechanical 1:
  the board outline again, w0.254
Mechanical 2:
  lines w0.1: 11.154,90.932 11.154,73.457 14.439,73.457 14.456,73.474 14.456,90.932 14.482,90.957 11.154,90.957 ; 77.25,87.5 77.25,95.5 ; 77.25,90 33.75,90 33.75,98 77.25,98
  text "Leiterplattendaten:" at 180.051,155.569 h1.5
  text "Technik: Zweiseitig SMD" at 180.051,149.219 h1.5
  text "Abmessungen: 51mmx42mm" at 180.051,146.679 h1.5
  text "Kontur: gefraest" at 180.051,144.139 h1.5
  text "*.GM1" at 211.801,144.139 h1.5
  text "Basismaterial: FR4, TG150, 1.55mm" at 180.051,141.599 h1.5
  text "Aufbau: 4-Lagen" at 180.051,137.789 h1.5
  text "Oberflaeche: chem. Gold (ENIG)" at 180.051,107.819 h1.5
  text "Vias Tented: Bottomside" at 180.07,104.41 h1.5
  text "Loetstopplack:" at 180.051,101.009 h1.5
  text "Top Layer" at 180.051,98.469 h1.5
  text "*.GTS" at 211.801,98.469 h1.5
  text "Bottom Layer" at 180.051,95.929 h1.5
  text "*.GBS" at 211.801,95.929 h1.5
  text "Bestueckungsdruck:" at 180.051,92.119 h1.5
  text "Top Layer" at 180.051,89.579 h1.5
  text "ja" at 211.801,89.579 h1.5
  text "Bottom Layer" at 180.051,87.039 h1.5
  text "keiner" at 211.801,87.039 h1.5
  text "Bohrdurchmesser min/max: 0.3mm/3.1mm" at 180.051,83.229 h1.5
  text "kleinste Leiterbildstrucktur: 125um" at 180.07,76.41 h1.5
  text "Herstellercode: kein blankes Kupfer" at 180.045,72.365 h1.5
  text "Elektrischer Test: ja" at 180.07,69.41 h1.5
  text "2375847" at 237.814,-26.126 h3.81
  text ".DokumentenNrLeiterplatte" at 181.489,-46.255 h3.81
Mechanical 4:
  drawing of 1156 lines, arcs and shapes, not listed
  text "Kennzeichnung:" at 180.553,55.333 h1.5
  text "Ettikettenmass: 20x7.5" at 180.553,52.793 h1.5
  text "Schrifthoehe: 1.5mm" at 180.553,50.253 h1.5
  text "Format:" at 180.553,47.713 h1.5
  text "1. Zeile: MMMMMMMVVV" at 180.553,45.173 h1.5
  text "2. Zeile: WWJJ/NNN" at 180.553,42.633 h1.5
  text "3. Zeile: AAAAAAAAAA" at 180.502,40.082 h1.5
  text "M: Materialnummer der fertigen Leiterplatte 7stellig" at 180.553,37.274 h1.5
  text "V: Version" at 180.553,34.734 h1.5
  text "W: Kalenderwoche Produktion" at 180.553,32.194 h1.5
  text "J: Produktionsjahr" at 180.553,29.654 h1.5
  text "N: Laufende Nummer der aktuellen Kalenderwoche" at 180.553,27.114 h1.5
  text "A: Bei Bedarf platinenspezifischer Text max. 10 Zeichen" at 180.477,24.624 h1.5
  text "DM: Datamatrixcode 6x6mm Modulgroesse min. 0,2mm" at 180.451,22.277 h1.5
  text "Inhalt: MMMMMMMVVV WWJJ/NNN AAAAAAAAAA" at 186.243,19.864 h1.5
  text "Beispiel:" at 180.451,17.284 h1.5
  text "Position der Kennzeichnung:" at 181.086,5.727 h1.5
Mechanical 13:
  lines w0.1: 19,32.5 19,77.5 25.175,77.5 25.175,32.5 19,32.5
Mechanical 16:
  drawing of 1687 lines, arcs and shapes, not listed
  text "1" at -99.308,218.54 h1.27
  text "2" at -50.286,218.54 h1.27
  text "3" at -1.264,218.54 h1.27
  text "4" at 47.758,218.54 h1.27
  text "5" at 96.78,218.54 h1.27
  text "6" at 145.802,218.54 h1.27
  text "7" at 194.824,218.54 h1.27
  text "8" at 243.846,218.54 h1.27
  text "A" at -121.406,184.504 h1.27
  text "A" at 267.214,184.504 h1.27
  text "B" at -121.406,114.146 h1.27
  text "B" at 267.214,111.146 h1.27
  text "C" at -121.406,43.788 h1.27
  text "C" at 267.214,43.788 h1.27
  text "DATUM" at 95.002,-18.696 h1.27
  text "NAME" at 116.338,-18.696 h1.27
  text "BENENNUNG" at 168.916,-18.696 h1.27
  text "MATERIAL-NR." at 239.782,-18.696 h1.27
  text "00" at 129.597,-19.547 h2.54
  text "-" at 137.725,-19.547 h2.54
  text "BEAR." at 84.588,-23.522 h1.27
  text "513mk" at 114.611,-23.886 h2.54
  text "19.03.2018" at 93.601,-23.937 h2
  text "D" at -121.406,-26.57 h1.27
  text "D" at 267.214,-26.57 h1.27
  text ".BoardNameAbkuerzung" at 169.17,-27.078 h3.81
  text "GEPR." at 84.842,-27.586 h1.27
  text "19.03.2018" at 93.601,-28.187 h2
  text "513mk" at 114.611,-28.407 h2.54
  text "GEN." at 84.842,-31.65 h1.27
  text "19.03.2018" at 93.601,-31.937 h2
  text ".BoardName" at 169.17,-32.158 h2.5
  text "513mk" at 114.611,-32.497 h2.54
  text "TRUMPF Schweiz AG" at 101.325,-37.964 h1.27
  text "FORMAT" at 168.408,-40.032 h1.27
  text "DOKUMENT-NR." at 181.108,-40.032 h1.27
  text "BLATT-NR." at 239.02,-40.032 h1.27
  text "von" at 256.292,-40.032 h1.27
  text "Lasertechnik" at 103.357,-40.275 h1.27
  text "TRUMPF Strasse 8" at 101.225,-42.826 h1.27
  text "7214 Gruesch" at 103.511,-44.985 h1.27
  text "A3" at 169.932,-46.382 h3.81
  text "1" at 242.576,-46.382 h3.81
  text "1" at 256.292,-46.382 h3.81
  text "Schweiz" at 106.178,-47.017 h1.27
  text "Copyright by TRUMPF" at 95.002,-53.494 h1.27
  text "VERSION" at 128.53,-53.494 h1.27
  text "AENDERUNGSNR." at 140.214,-53.494 h1.27
  text "GEPR." at 159.264,-53.494 h1.27
  text "2" at -50.286,-58.32 h1.27
  text "3" at -1.264,-58.32 h1.27
  text "4" at 47.758,-58.32 h1.27
  text "5" at 96.78,-58.32 h1.27
  text "6" at 145.802,-58.32 h1.27
  text "7" at 194.824,-58.32 h1.27
  text "8" at 243.846,-58.32 h1.27

## Dimensions
-2,3 to 112,3 on Mechanical 2
112,3 to 112,107 on Mechanical 2
-5,0 to 115,0 on Mechanical 2
115,0 to 115,110 on Mechanical 2

## Text inside footprints (layer, text, board x,y; h text height)
X6: Assembly Notes "PCB Edge" at -7.05,22.3 h1.02 r270
X7: Assembly Notes "PCB Edge" at -7.05,86.3 h1.02 r270
X10: Assembly Notes "PCB Edge" at -7.05,54.3 h1.02 r270